# Altium PCB PCB2.PcbDoc
Units mm, origin at the board's own origin, x right, y up, seen from the top; angles counter-clockwise.
Board outline 48.39 x 42.04 mm, 2 copper layers (Top Layer, Bottom Layer); 16 components, 10 nets, 35 pads, 0 vias.
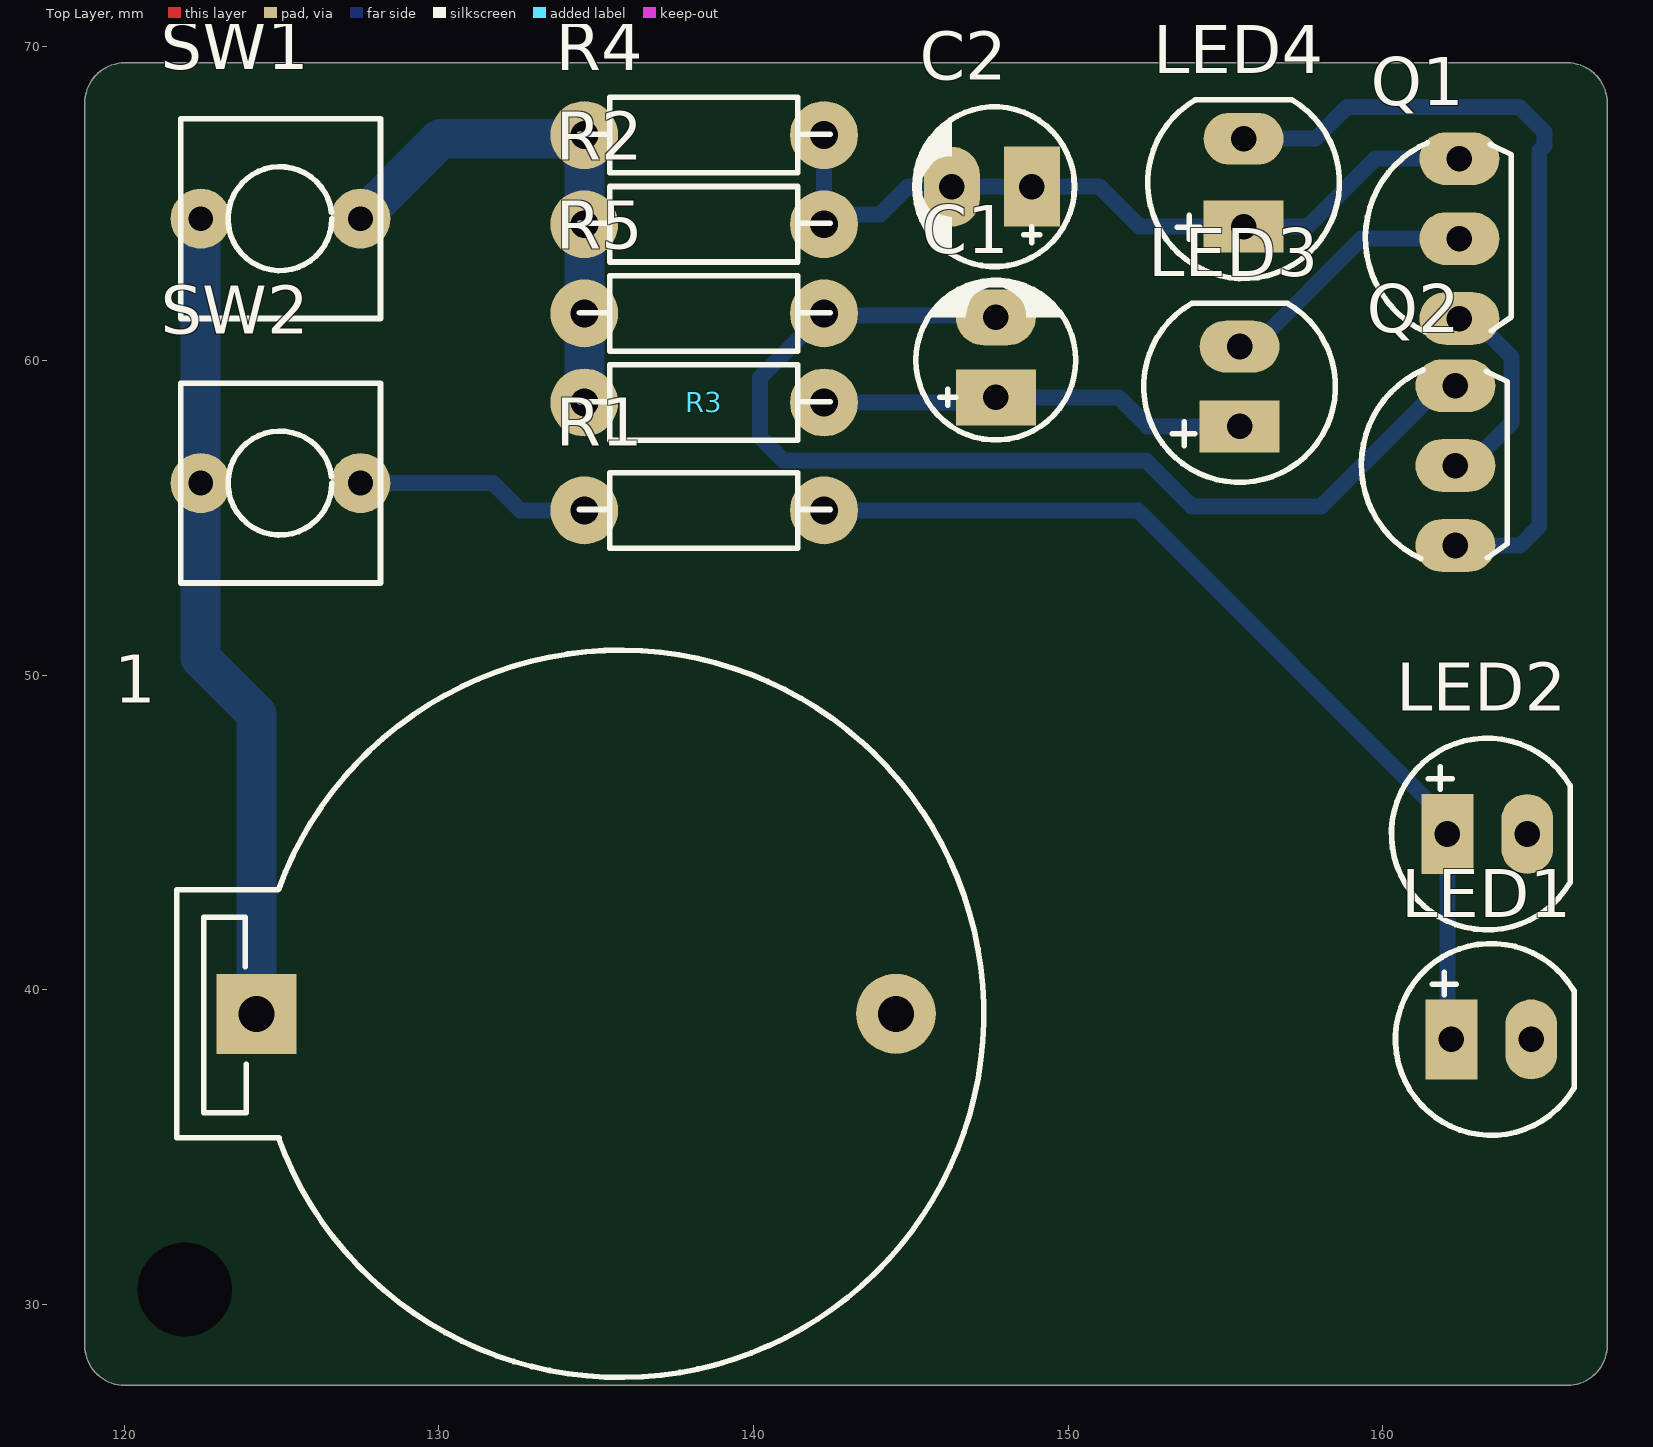
[diagram p0: Top Layer view]
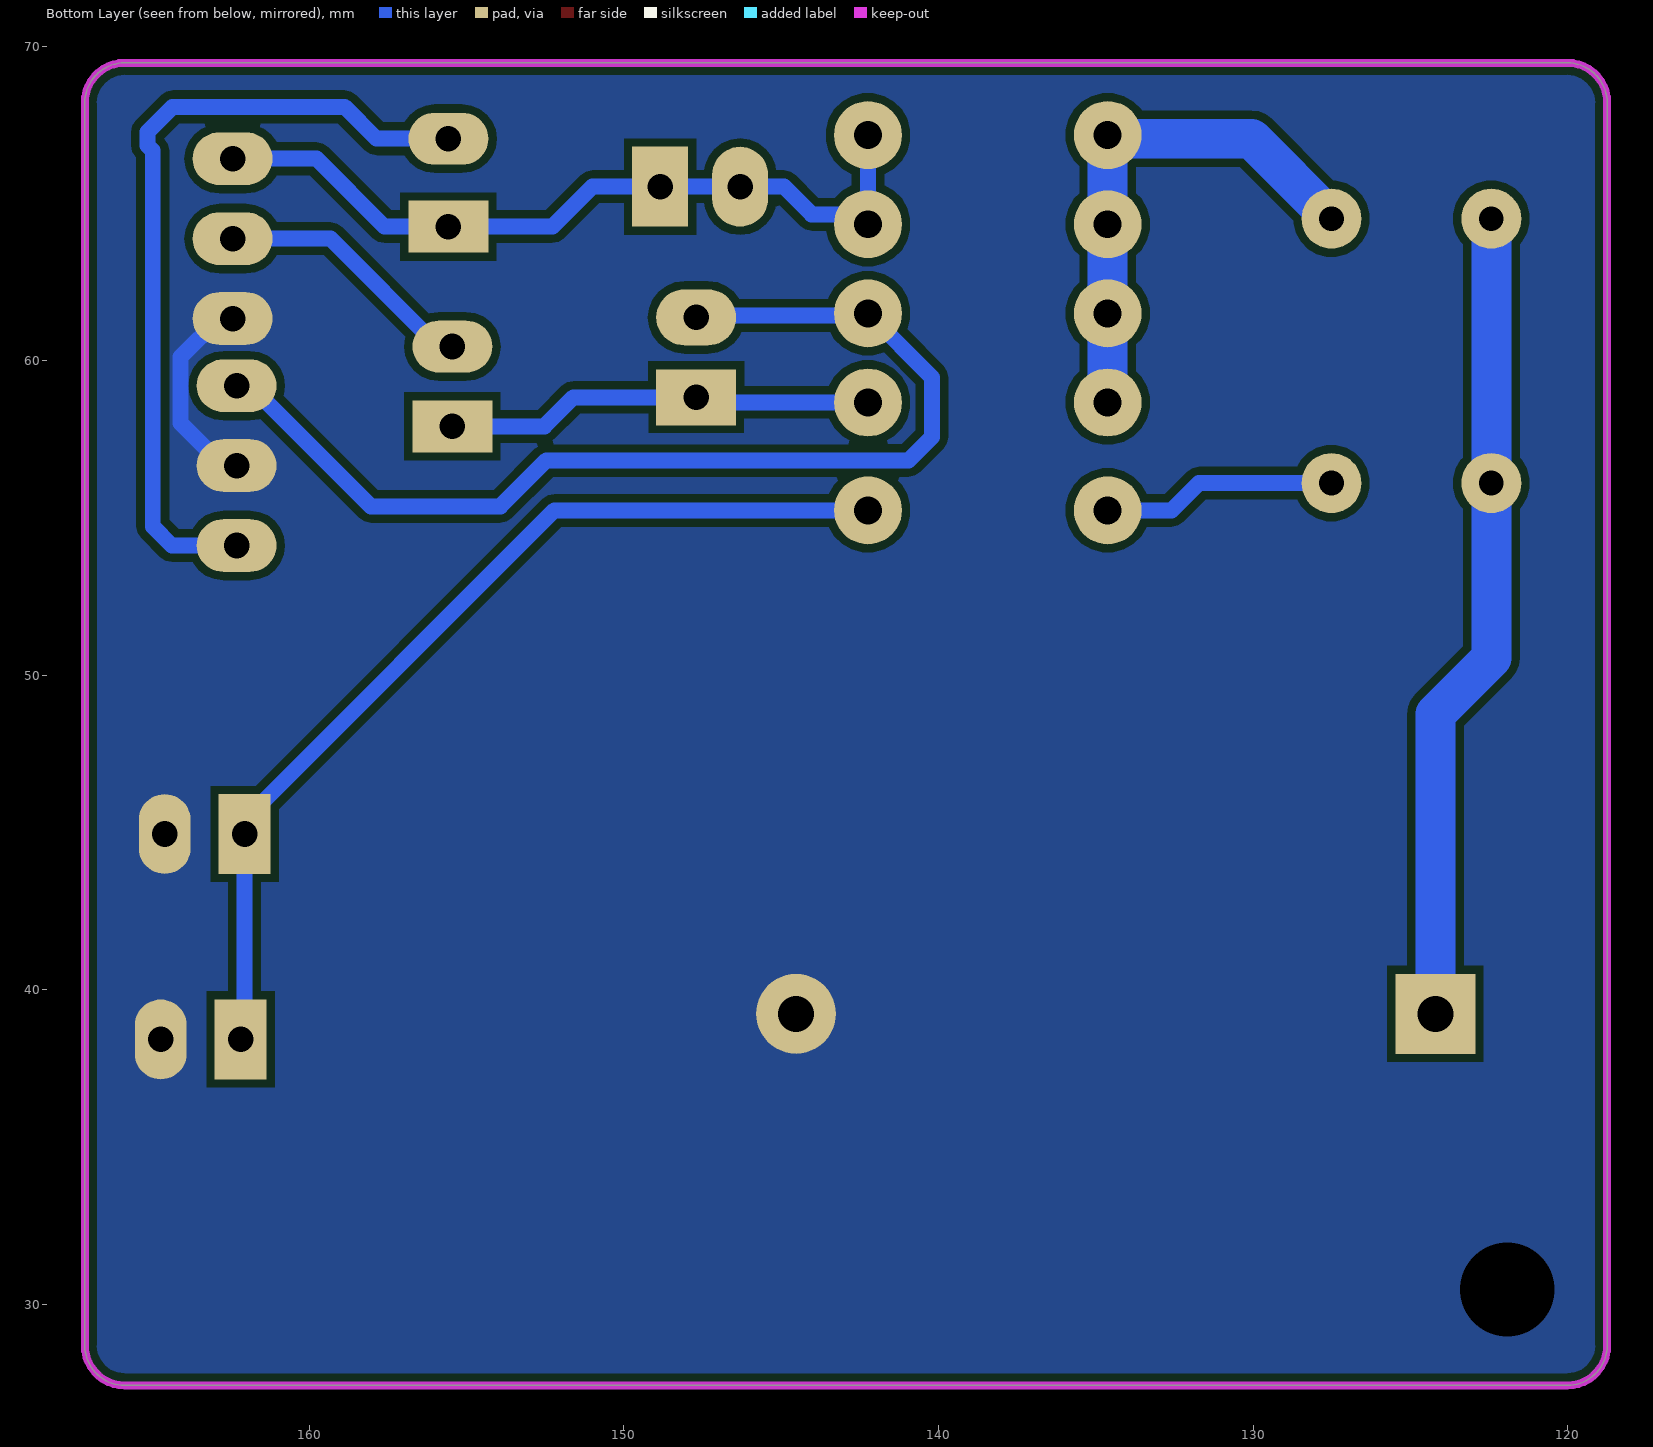
[diagram p1: Bottom Layer view, seen from below]
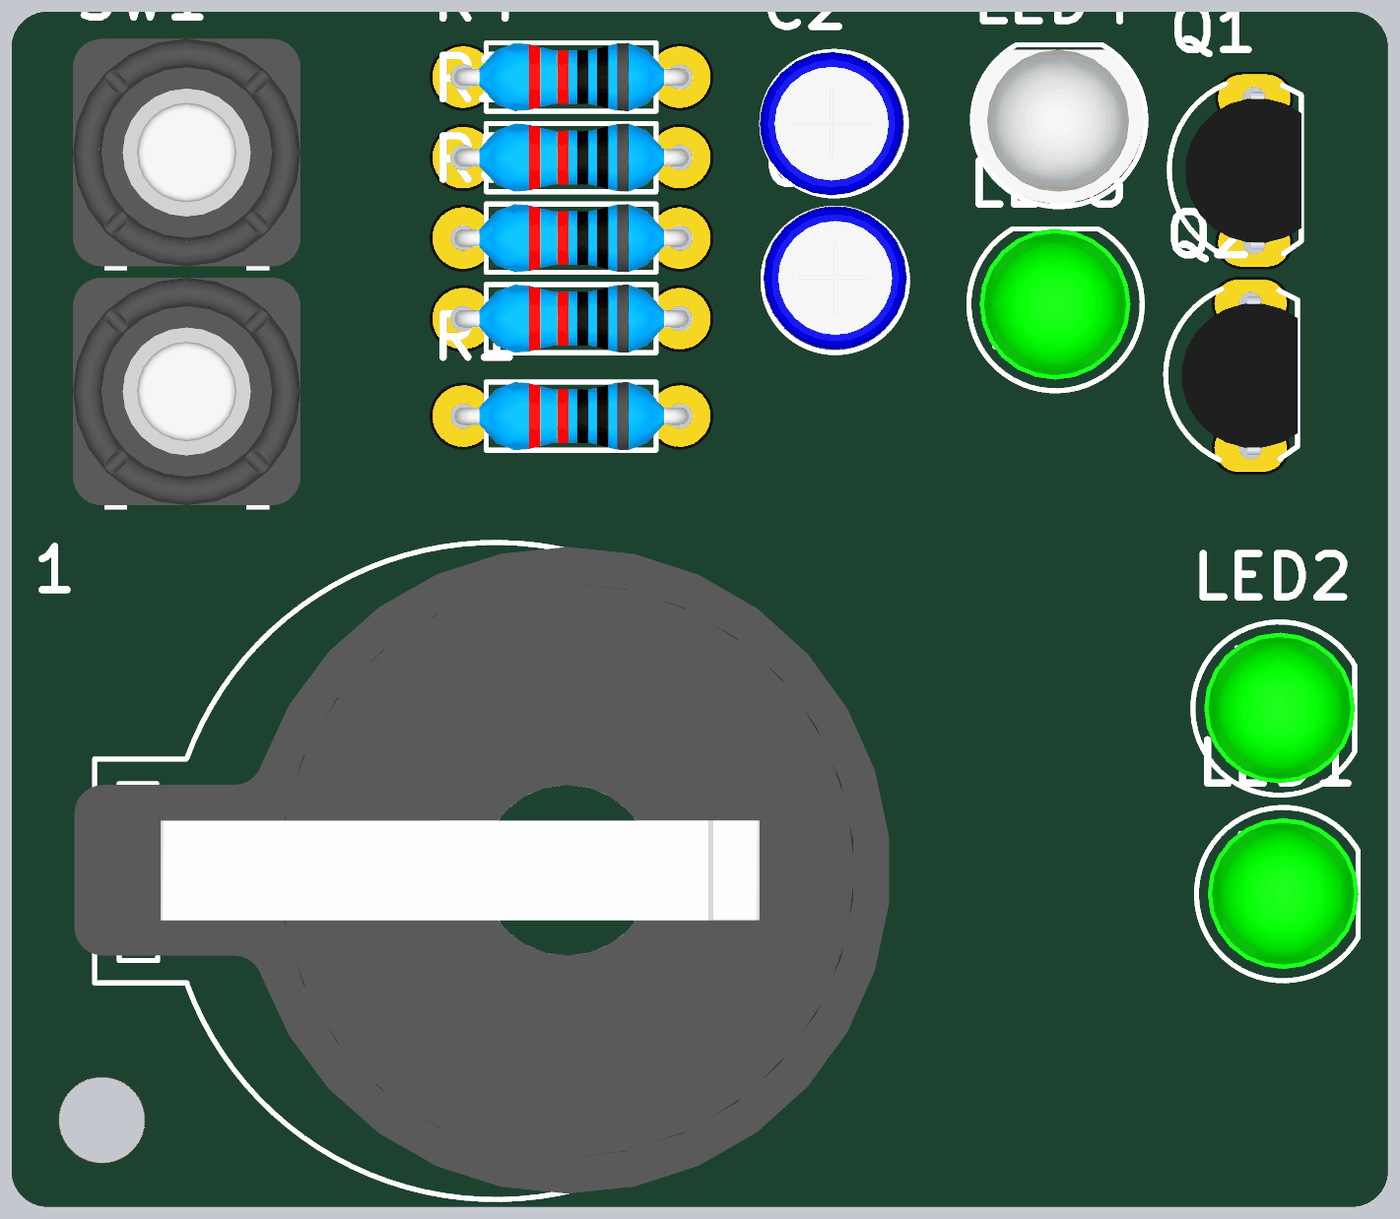
[diagram p2: 3D render of the assembled board from above, using the file's embedded part models]

## Layer stack, top to bottom
Top Solder: solder mask 0.0102, Solder Resist, Dk 3.5
Top Layer: signal copper 0.0356
Dielectric 1: dielectric 0.32, FR-4, Dk 4.8
Bottom Layer: signal copper 0.0356
Bottom Solder: solder mask 0.0102, Solder Resist, Dk 3.5

## Board outline
118.745,28.702 118.745,68.199 cw(c120.015,68.199) 120.015,69.469 165.862,69.469 cw(c165.862,68.199) 167.132,68.199 167.132,28.702 cw(c165.862,28.702) 165.862,27.432 120.015,27.432 cw(c120.015,28.702)

## Design rules (kind name [scope] priority, off if disabled: settings)
Clearance [All] p1: gap=0.254 ignorepadtopadclearanceinfootprint=FALSE
PolygonConnect [All] p1: connectstyle=Direct reliefconductorwidth=0.254 reliefentries=4 polygonreliefangle="90 Angle" airgapwidth=0.254
RoutingVias [All] p1: holewidth=0.711 width=1.27 viastyle="Through Hole" minholewidth=0.711 minwidth=1.27 maxholewidth=0.711 maxwidth=1.27
SolderMaskExpansion [All] p1: expansion=0.102 istentingtop=FALSE
Width [All] p1: maxlimit=1.27 minlimit=0.381 preferedwidth=0.508
30 further rules are at their usual default settings.

## Components (designator, comment, footprint, x,y, rotation, side; value= is the part's Value field where it differs from the comment)
1 "PIN 3V" PIN3V 124.206,39.243 r0 top
C1 "10uF" CP1/2 147.701,58.837 r90 top value=10uF/50V
C2 "10uF" CP1/2 148.844,65.532 r180 top value=10uF/50V
LED1 "LED" "LED-5 GRe" 162.179,38.43 r0 top value="LED 3 ly Single Colour"
LED2 "LED" "LED-5 GRe" 162.052,44.958 r0 top value="LED 3 ly Single Colour"
LED3 "LED" "LED-5 GRe" 155.448,57.912 r90 top value="LED 3 ly Single Colour"
LED4 "LED" LED-5TRED 155.575,65.659 r90 top value="LED 3 ly Single Colour"
Q1 "D468" QTO-92 162.433,63.881 r90 top value=C1815
Q2 "D468" QTO-92 162.306,56.667 r90 top value=C1815
R1 "22R" RES-1/4W-SMALL 138.684,55.245 r180 top value="R1/4W - 1K"
R2 "100K" RES-1/4W-SMALL 138.684,64.338 r180 top value="R1/4W - 1K"
R3 "75R" RES-1/4W-SMALL 138.684,58.674 r180 top value="R1/4W - 1K"
R4 "75R" RES-1/4W-SMALL 138.684,67.17 r180 top value="R1/4W - 1K"
R5 "100K" RES-1/4W-SMALL 138.684,61.506 r180 top value="R1/4W - 1K"
SW1 "SW" SW2 122.428,64.516 r0 top value="SW chip 2 pin"
SW2 "SW" SW2 122.428,56.112 r0 top value="SW chip 2 pin"

## Footprints (in the part's own frame and the unit in brackets; to place one, negate y for a bottom-side part, rotate by r counter-clockwise, add the part's x,y. Pads: shape width x height; smd on the part's side, far side on the other; paste and mask are expansions set on the pad)
CP1/2 [mil] "Tu hoa < 22uF/16>50V"
  rect 70x100 hole 32: 1(0,0)
  oval 70x100 hole 32: 2(100,0)
  silkscreen extent -53,-100 146,100, body extent -49,-99 149,99, height 287
"LED-5 GRe" [mil] "LED 2 PIN, 5 ly , Only colour,pin to pin 100mil"
  rect 65x100 hole 32: 1(0,0)
  oval 65x100 hole 32: 2(100,0)
  silkscreen extent -70,-120 154,120, body extent -54,-104 154,105, height 337
LED-5TRED [mil] "LED 2 PIN, 5 ly , Only colour, pin to pin 110mil"
  rect 65x100 hole 32: 1(-55,0)
  oval 65x100 hole 32: 2(55,0)
  silkscreen extent -120,-120 104,120, body extent -116,-117 98,120, height 339
PIN3V [mil] "Socket PIN 3V"
  rect 100x100 hole 45: 1(0,0)
  round 100 hole 45: 2(800,0)
  silkscreen extent -100,-455 910,455, body extent -128,-447 1002,449, height 278
QTO-92 [mil] "TO-92"
  oval 66x100 hole 32: 1(-100,0) 2(0,0) 3(100,0)
  silkscreen extent -117,-65 120,118, body extent -109,-66 109,95, height 245
RES-1/4W-SMALL [mil]
  round 85 hole 35: 1(-140,0) 2(160,0)
  silkscreen extent -148,-47 166,47, body extent -152,-47 172,47, height 97
SW2 [mil] "SW button 2pin, 250x 250 mil"
  round 75 hole 31: 1(0,0) 2(200,0)
  silkscreen extent -25,-125 225,125, body extent -60,-163 255,157, height 257

## Part data
1: "Battery 3VDC"
C1 C2: library part CP1, "Cap P  0,1uF < 22uF , 16 - 50V", Description 1="10 => 220uF/6,3V/10V - 10uF => 100uF/16V", Description 2="0,1uF => 33uF/50V - 10uF => 22uF/63V", Description 3="0,47uF => 10uF/100V"
LED1 LED2 LED3 LED4: "LED Single colour Green and Red"
Q1 Q2: library part NPN_ECB, "P 600mW, ECB"
R1 R2 R3 R4 R5: library part "RES 1/4W", "Resistor 1/4W"
SW1 SW2: library part SW2, "Switch button 2 pin"

## Free pads (board coordinates)
  round 1.524 hole 3: 5(121.92,30.48)

## Nets (pads, with @x,y where several pads share a name; then routed paths per layer and width w, separated by ;. In a path a pad name is that pad's centre, name@x,y a point inside that pad or via, vN(x,y) a via of type N, cw(c..) or ccw(c..) an arc to the next point about the centre after c; other vN are vias at no path point)
+3VDC: 1.1 SW1.1 SW2.1 | length 26
  Bottom Layer w1.27: SW1.1 SW2.1 122.428,50.546 124.206,48.768 1.1
GND: 1.2 LED1.2 LED2.2 pad.5 Q1.1 Q2.2 | length 8.1
  Top Layer w0.508: Q2.2@161.976,56.667 Q2.2
  Bottom Layer w0.508: 1.2 1.2@144.653,39.243 ; Q2.2@161.932,56.667 Q2.2 162.738,56.667 164.084,58.013 164.084,60.122 162.865,61.341 Q1.1 ; LED2.2 LED2.2@164.655,44.895 ; LED1.2@164.655,38.493 LED1.2 LED1.2@164.719,37.985
NetC1_1: C1.1 LED3.1 R3.1 | length 13.7
  Bottom Layer w0.508: R3.1 147.538,58.674 C1.1 151.602,58.837 152.527,57.912 LED3.1
NetC1_2: C1.2 Q2.3 R5.1 | length 34.9
  Bottom Layer w0.508: C1.2 147.636,61.441 142.305,61.441 R5.1 140.208,59.474 140.208,57.575 140.95,56.832 152.463,56.832 153.924,55.372 158.039,55.372 161.874,59.207 Q2.3
NetC2_1: C2.1 C2.2 LED4.1 Q1.3 R2.1 R4.1 | length 24.9
  Bottom Layer w0.508: R4.1 R2.1 142.556,64.654 144.029,64.654 144.907,65.532 C2.2 C2.1 151.003,65.532 152.273,64.262 LED4.1 157.607,64.262 159.766,66.421 Q1.3
NetLED1_1: LED1.1 LED2.1 R1.1 | length 30.9
  Bottom Layer w0.508: R1.1 152.209,55.245 162.052,45.402 LED2.1 162.052,38.557 LED1.1
NetLED3_2: LED3.2 Q1.2 | length 8.4
  Bottom Layer w0.508: LED3.2 155.892,60.452 159.321,63.881 Q1.2
NetLED4_2: LED4.2 Q2.1 | length 25.8
  Bottom Layer w0.508: LED4.2 157.861,67.056 158.877,68.072 164.338,68.072 165.144,67.266 165.144,66.846 164.973,66.675 164.973,54.737 164.363,54.127 Q2.1
NetR1_2: R1.2 SW2.2 | length 7.5
  Bottom Layer w0.508: SW2.2 131.721,56.112 132.588,55.245 R1.2
V_DH: R2.2 R3.2 R4.2 R5.2 SW1.2 | length 16.7
  Bottom Layer w1.27: SW1.2@127.68,64.516 SW1.2 130.048,67.056 134.62,67.056 R5.2 R3.2

## Polygon pours and split planes (outlines as drawn)
GND on Bottom Layer "GND_L02_P001" (solid, pour order 1): 119.888,69.596 cw(c119.888,69.469) 120.015,69.469 165.735,69.469 cw(c165.735,68.072) 167.132,68.072 167.132,28.702 cw(c165.735,28.702) 165.735,27.305 120.396,27.305 cw(c120.396,29.083) 118.618,29.083 118.618,68.072 cw(c120.015,68.199)
GND on Bottom Layer "GND_L02_P000" (solid, pour order 0): 118.745,68.199 cw(c120.278,68.199) 119.194,69.283 119.38,69.469 166.243,69.469 cw(c166.243,68.58) 167.132,68.58 167.132,28.702 cw(c165.862,28.702) 165.862,27.432 120.015,27.432 cw(c120.015,28.702) 118.745,28.702

## Keep-outs
Bottom Layer:
  lines w0.254: 118.745,28.702 ccw(c120.015,28.702) 120.015,27.432 165.862,27.432 ccw(c165.862,28.702) 167.132,28.702 167.132,68.199 ccw(c165.862,68.199) 165.862,69.469 121.031,69.469 120.015,69.469 ccw(c120.015,68.199) 118.745,68.199 118.745,67.183 118.745,28.702